# Altium PCB 2401透传3.PcbDoc
Units mm, origin at the board's own origin, x right, y up, seen from the top; angles counter-clockwise.
Board outline 152.4 x 101.6 mm, 2 copper layers (Top Layer, Bottom Layer); 27 components, 59 nets, 148 pads, 30 vias.
Unrouted connection lines stored in the file: 3.
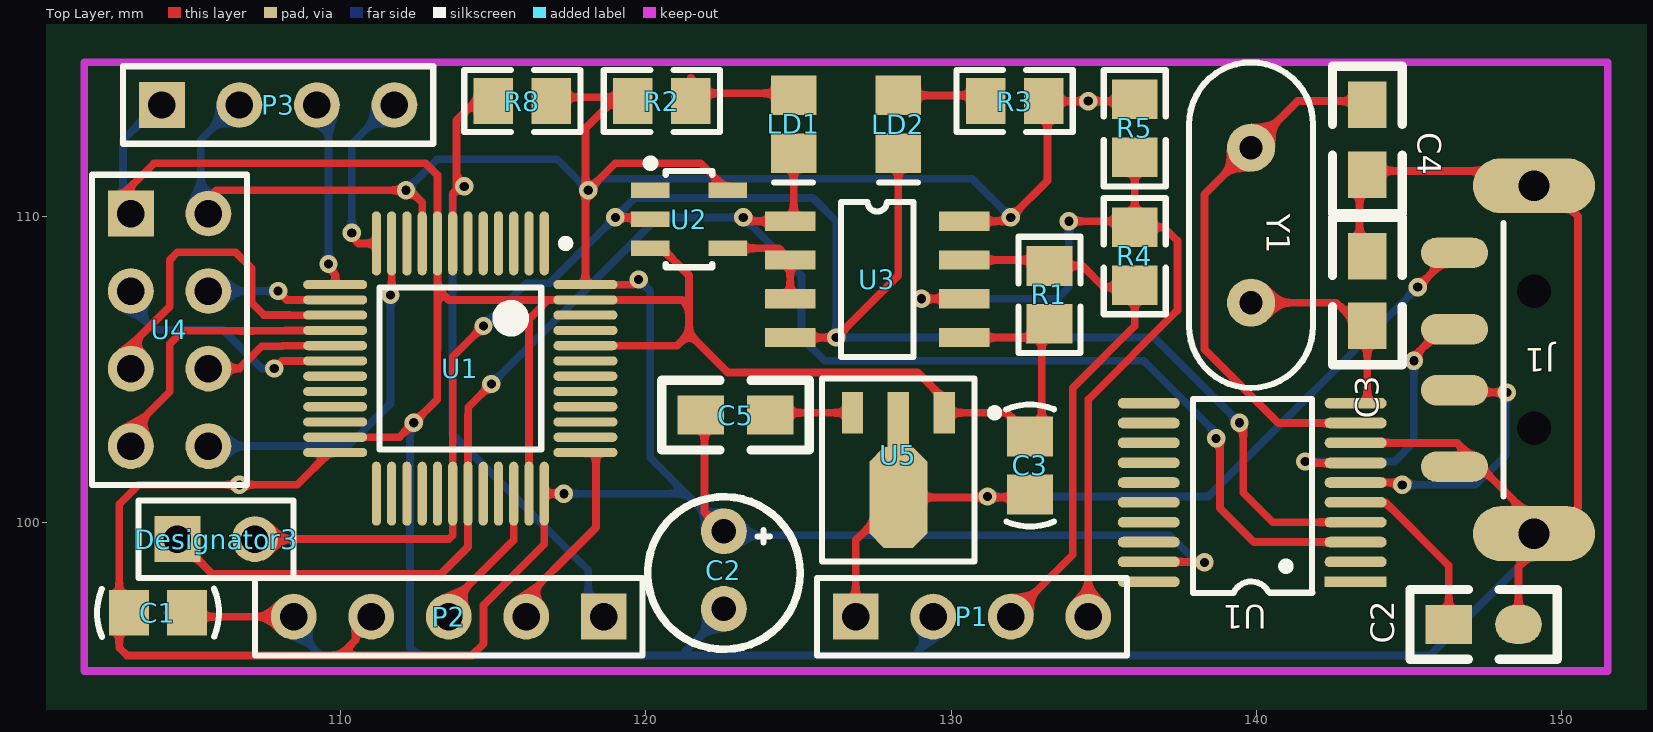
[diagram p0: Top Layer view]
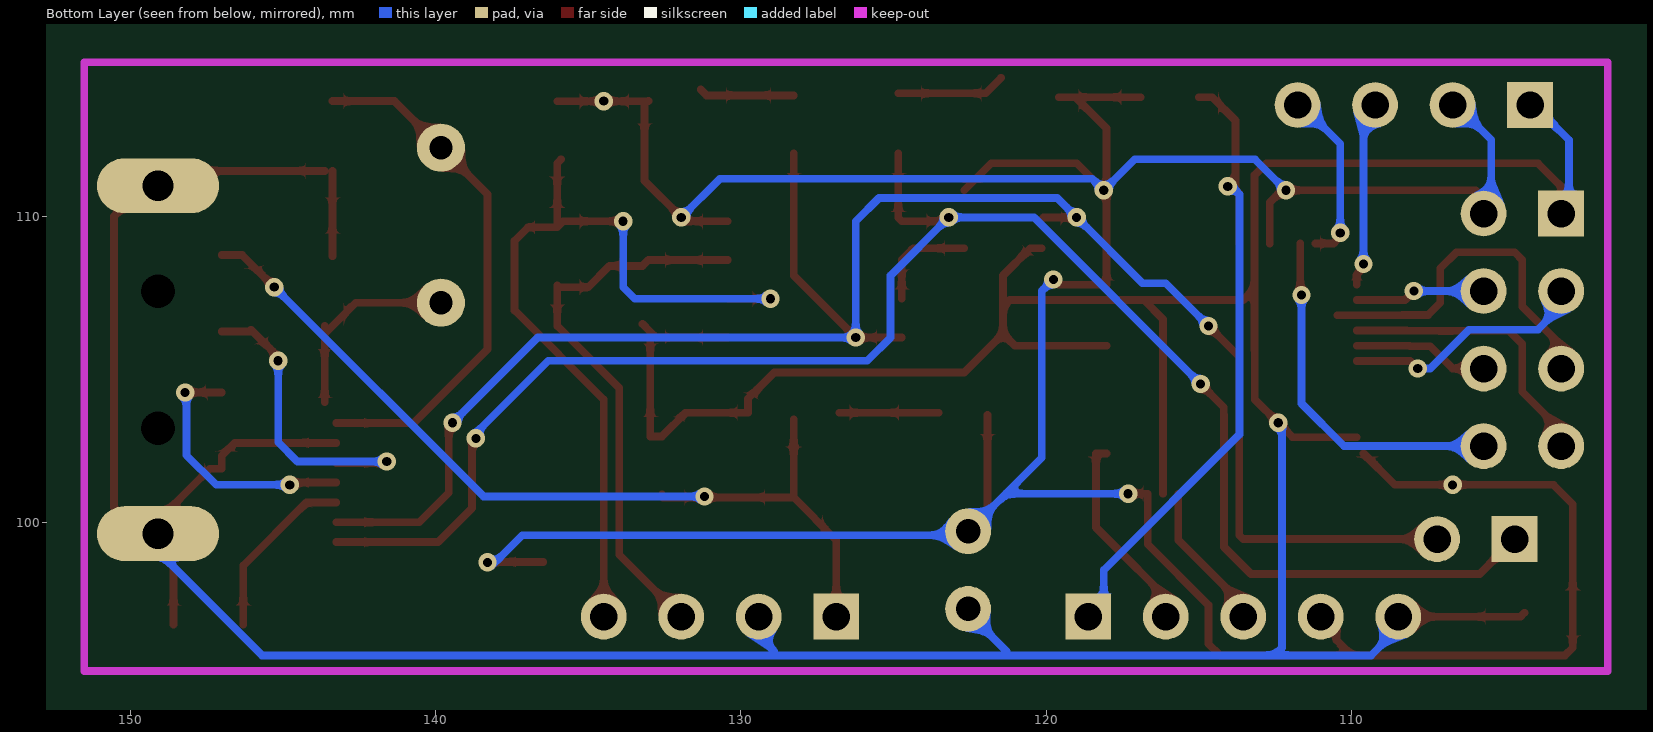
[diagram p1: Bottom Layer view, seen from below]

## Layer stack, top to bottom
Top Solder: solder mask 0.0102, Solder Resist, Dk 3.5
Top Layer: signal copper 0.0356
Dielectric 1: dielectric 0.32, FR-4, Dk 4.8
Bottom Layer: signal copper 0.0356
Bottom Solder: solder mask 0.0102, Solder Resist, Dk 3.5

## Board outline
25.4,25.4 177.8,25.4 177.8,127 25.4,127

## Design rules (kind name [scope] priority, off if disabled: settings)
Clearance [All] p1: gap=0.254 ignorepadtopadclearanceinfootprint=FALSE except(0: Arc-Hole Track-Hole SMDPad-Hole THPad-Hole Via-Hole Fill-Hole Poly-Hole Region-Hole Text-Hole)
PolygonConnect [All] p1: connectstyle=Relief reliefconductorwidth=0.254 reliefentries=4 polygonreliefangle="90 Angle" airgapwidth=0.254
RoutingVias [All] p1: holewidth=0.711 width=1.27 viastyle="Through Hole" minholewidth=0.711 minwidth=1.27 maxholewidth=0.711 maxwidth=1.27
SolderMaskExpansion [All] p1: expansion=0.102
Width [All] p1: maxlimit=0.254 minlimit=0.254 preferedwidth=0.254
30 further rules are at their usual default settings.

## Classes and differential pairs
component class 2401透传: C1 C2 LD1 LD2 P1 P2 R1 R2 R3 R4 R5 U2 U3 U4 U5

## Components (designator, comment, footprint, x,y, rotation, side; value= is the part's Value field where it differs from the comment)
C1 "Cap" C-RAD-0805 104.013,97.028 r180 top value=104
C2 "16V/220UF" C_Φ5 122.555,100.33 r270 top
C2 "Cap" 0805#1 148.59,96.647 r180 top
C3 "Cap" C-RAD-0805 132.588,101.854 r270 top value=104 (schematic designator C1)
C3 "Cap" 0805#2 143.637,106.426 r90 top
C4 "Cap" 0805#2 143.637,113.665 r270 top
C5 "Cap" 0805#2 121.793,103.505 r0 top (schematic designator C4)
Designator3 "Comment" HDR1X2 104.648,99.441 r0 top
J1 "USB-2" USB-SM-A 151.807,105.319 r0 top
LD1 "red" LED_0805 124.841,113.03 r270 top
LD2 "red" LED_0805 128.27,113.03 r270 top
P1 "Header 4" HDR1X4 126.873,96.901 r0 top
P2 "5pin" HDR1X5 118.618,96.901 r180 top
P3 "Header 4" HDR1X4 104.14,113.665 r0 top (schematic designator P1)
R1 "电阻" 0805-1 133.223,107.442 r270 top value=10k
R2 "电阻" 0805-1 120.523,113.792 r180 top value=1k
R3 "电阻" 0805-1 132.08,113.792 r0 top value=1k
R4 "电阻" 0805-1 136.017,108.712 r270 top value=100
R5 "电阻" 0805-1 136.017,112.903 r270 top value=10k
R8 "Res1" 0805-1 115.951,113.792 r180 top value=10K (schematic designator R6)
U1 "CH340T" SSOP20 140.081,100.584 r90 top
U1 "STM32F103C" LQFP-48_M 113.919,105.029 r270 top
U2 "74AHC1G14DBVR" SOT-23-5 120.142,110.871 r0 top
U3 "MAX485" SOP-8 124.729,109.855 r0 top
U4 "WIRELESS" HDR2X4 103.124,110.109 r270 top
U5 "1117-3.3" SOT-89 128.27,103.357 r180 top
Y1 "XTAL" XTAL2 139.827,112.268 r270 top

## Footprints (in the part's own frame and the unit in brackets; to place one, negate y for a bottom-side part, rotate by r counter-clockwise, add the part's x,y. Pads: shape width x height; smd on the part's side, far side on the other; paste and mask are expansions set on the pad)
0805#1 [mil]
  oval 60x50 smd: 1(0,0)
  rect 60x50 smd: 2(90,0)
  silkscreen extent -50,-45 140,45
0805#2 [mil]
  rect 60x50 smd: 1(0,0) 2(90,0)
  silkscreen extent -50,-45 140,45
0805-1 [mm]
  rect 1.3x1.5 smd: 1(-0.95,0) 2(0.95,0)
  silkscreen extent -1.91,-1.02 1.91,1.02, body extent -1,-0.62 1,0.63, height 0.5
C-RAD-0805 [mm]
  rect 1.3x1.5 smd: 1(-0.95,0) 2(0.95,0)
  silkscreen extent -2,-0.79 2,0.79, body extent -1.27,-0.64 1.27,0.64, height 0.9
C_Φ5 [mm]
  round 1.5 hole 0.8: 1(0.635,0) 2(3.175,0)
  silkscreen extent -0.5,-2.5 4.5,2.5
HDR1X2 [mm] "Connector; Header; 2 Position"
  rect 1.5x1.5 hole 0.9: 1(0,0)
  round 1.5 hole 0.9: 2(2.54,0)
  silkscreen extent -1.27,-1.27 3.81,1.27
HDR1X4 [mm] "Connector; Header; 4 Position"
  rect 1.5x1.5 hole 0.9: 1(0,0)
  round 1.5 hole 0.9: 2(2.54,0) 3(5.08,0) 4(7.62,0)
  silkscreen extent -1.27,-1.27 8.89,1.27
HDR1X5 [mm] "Connector; Header; 5 Position"
  rect 1.5x1.5 hole 0.9: 1(0,0)
  round 1.5 hole 0.9: 2(2.54,0) 3(5.08,0) 4(7.62,0) 5(10.16,0)
  silkscreen extent -1.27,-1.27 11.43,1.27
HDR2X4 [mm] "Connector; Header; 4x2 Position"
  rect 1.5x1.5 hole 0.9: 1(0,0)
  round 1.5 hole 0.9: 2(0,2.54) 3(2.54,0) 4(2.54,2.54) 5(5.08,0) 6(5.08,2.54) 7(7.62,0) 8(7.62,2.54)
  silkscreen extent -1.27,-1.27 8.89,3.81
LED_0805 [mm]
  rect 1.3x1.5 smd: 1(-0.95,0) 2(0.95,0)
  silkscreen extent 1.91,-0.63 1.91,0.64
LQFP-48_M [mm] "Thin QFP, 48-Leads, Body 7x7mm, Pitc"
  oval 2.1x0.3 smd: 1(-4.1,2.75) 2(-4.1,2.25) 3(-4.1,1.75) 4(-4.1,1.25) 5(-4.1,0.75) 6(-4.1,0.25) 7(-4.1,-0.25) 8(-4.1,-0.75) 9(-4.1,-1.25) 10(-4.1,-1.75) 11(-4.1,-2.25) 12(-4.1,-2.75) 25(4.1,-2.75) 26(4.1,-2.25) 27(4.1,-1.75) 28(4.1,-1.25) 29(4.1,-0.75) 30(4.1,-0.25) 31(4.1,0.25) 32(4.1,0.75) 33(4.1,1.25) 34(4.1,1.75) 35(4.1,2.25) 36(4.1,2.75)
  oval 0.3x2.1 smd: 13(-2.75,-4.1) 14(-2.25,-4.1) 15(-1.75,-4.1) 16(-1.25,-4.1) 17(-0.75,-4.1) 18(-0.25,-4.1) 19(0.25,-4.1) 20(0.75,-4.1) 21(1.25,-4.1) 22(1.75,-4.1) 23(2.25,-4.1) 24(2.75,-4.1) 37(2.75,4.1) 38(2.25,4.1) 39(1.75,4.1) 40(1.25,4.1) 41(0.75,4.1) 42(0.25,4.1) 43(-0.25,4.1) 44(-0.75,4.1) 45(-1.25,4.1) 46(-1.75,4.1) 47(-2.25,4.1) 48(-2.75,4.1)
  silkscreen extent -4.22,-2.65 2.65,3.57, body extent -3.5,-3.5 3.5,3.5, height 1.6
SOP-8 [mil]
  rect 65x25 smd: 1(0,0) 2(0,-50) 3(0,-100) 4(0,-150) 5(224.41,-150) 6(224.41,-100) 7(224.41,-50) 8(224.41,0)
  silkscreen extent 65,-175 159,25
SOT-23-5 [mil]
  rect 50x20 smd: 1(0,0) 2(0,-37.4) 3(0,-74.8) 4(100,-74.8) 5(100,0)
  silkscreen extent 0,-99 80,35
SOT-89 [mm]
  rect 0.7x1.8 smd: 1(0,0)
  oct 1.9x3.3 smd: 1(0,2.55)
  rect 0.7x1.35 smd: 2(-1.5,-0.225) 3(1.5,-0.225)
  silkscreen extent -3.28,-1.35 2.5,4.65
SSOP20 [mm]
  rect 0.35x2.032 smd: 1(-2.54,-3.175)
  oval 0.35x2.032 smd: 2(-1.89,-3.175) 3(-1.24,-3.175) 4(-0.59,-3.175) 5(0.06,-3.175) 6(0.71,-3.175) 7(1.35,-3.175) 8(2.01,-3.175) 9(2.66,-3.175) 10(3.31,-3.175) 11(3.31,3.606) 12(2.66,3.606) 13(2.01,3.606) 14(1.36,3.606) 15(0.71,3.606) 16(0.06,3.606) 17(-0.59,3.606) 18(-1.24,3.606) 19(-1.89,3.606) 20(-2.54,3.606)
  silkscreen extent -2.91,-1.75 3.45,2.15
USB-SM-A [mm]
  oval 2.2x1 smd: 1(-5.309,3.5) 2(-5.309,1) 3(-5.309,-1) 4(-5.309,-3.5)
  oval 4x1.8 hole 1: 5(-2.709,-5.7) 6(-2.709,5.7)
  round 0.8 hole 1.1 unplated: MH1(-2.709,-2.25) MH2(-2.709,2.25)
  silkscreen extent -3.71,-4.47 -3.71,4.48
XTAL2 [mil]
  round 62 hole 30: 1(0,0) 2(200,0)
  silkscreen extent -110,-80 310,80

## Part data
C1 C3: "无极性电容", LatestRevisionDate=17-Jul-2002, LatestRevisionNote="Re-released for DXP Platform.", PackageReference=RAD-0.3, Published=8-Jun-2000, Publisher="Altium Limited"
C2: library part Ca, "电解电容", LatestRevisionDate=17-Jul-2002, LatestRevisionNote="Re-released for DXP Platform.", PackageReference=POLAR0.8, Published=8-Jun-2000, Publisher="Altium Limited"
C2 C3 C4 C5: "Capacitor"
LD1 LD2: library part LED2, "Typical RED, GREEN, YELLOW, AMBER GaAs LED", Published=8-Jun-2000, Publisher="Altium Limited", Revision="July-2002: Re-released for DXP Platform."
P1 P3: "Header, 4-Pin", LatestRevisionDate=17-Jul-2002, LatestRevisionNote="Re-released for DXP Platform.", Publisher="Altium Limited"
P2: library part "Header 5", "程序下载接口", LatestRevisionDate=17-Jul-2002, LatestRevisionNote="Re-released for DXP Platform.", Publisher="Altium Limited"
R1 R2 R3 R4 R5: library part Res1, "贴片电阻", LatestRevisionDate=17-Jul-2002, LatestRevisionNote="Re-released for DXP Platform.", PackageReference=AXIAL-0.4, Published=8-Jun-2000, Publisher="Altium Limited"
R8: "贴片电阻", LatestRevisionDate=17-Jul-2002, LatestRevisionNote="Re-released for DXP Platform.", PackageReference=AXIAL-0.4, Published=8-Jun-2000, Publisher="Altium Limited"
U1: "STM32单片机48引脚"
U4: library part NRF24L01
U5: library part 71, "LDO", ComponentAvailability=Obsolete, ComponentLink1Description="Manufacturer Link", ComponentLink1URL=http://www.national.com/, ComponentLink2Description="Discontinuation Notice", ComponentLink2URL=http://www.national.com/obs/obsolescence.txt, DatasheetVersion=May-1999, Note="Tab is connected to GND", PackageDescription="TO, Thru-Hole, Vertical, Heatsink Mounted; 3 In-Line Leads; Pitch 2.54 mm", PackageReference=T03B, PackageVersion=1995, Published=15-Apr-2002, Publisher="Altium Limited"
Y1: "Crystal Oscillator"

## Via types
v1: diameter 0.6, hole 0.3, Top Layer to Bottom Layer, 30 vias

## Nets (pads, with @x,y where several pads share a name; then routed paths per layer and width w, separated by ;. In a path a pad name is that pad's centre, name@x,y a point inside that pad or via, vN(x,y) a via of type N, cw(c..) or ccw(c..) an arc to the next point about the centre after c; other vN are vias at no path point)
5VCC: C3.2@132.588,100.904 J1.1 P1.1 U5.1 | length 30.5
  Top Layer w0.254: P1.1 126.873,99.41 U5.1@128.27,100.807 ; U5.1@128.27,103.357 U5.1@128.27,100.807 ; C3.2@132.588,100.904 132.588,100.838 132.557,100.807 U5.1@128.27,100.807 ; v1(145.288,107.696) 146.339,108.747 J1.1@147.006,108.747
  Bottom Layer w0.254: v1(131.191,100.838) 138.43,100.838 v1(145.288,107.696)
485_A: P1.4 R4.1 R5.2 U3.6 | length 28.2
  Top Layer w0.254: v1(129.032,107.315) U3.6 ; v1(133.858,109.855) 135.824,109.855 R4.1 ; P1.4 134.493,104.013 137.414,106.934 137.414,109.22 136.972,109.662 R4.1 ; R5.2@135.89,111.887 136.017,111.76 R4.1
  Bottom Layer w0.254: v1(129.032,107.315) 133.477,107.315 133.858,107.696 v1(133.858,109.855)
485_B: P1.3 R1.1 R4.2 U3.7 | length 18.5
  Top Layer w0.254: U3.7 133.03,108.585 R1.1 134.305,108.392 135.001,107.696 R4.2@136.017,107.696 ; P1.3 133.985,98.933 133.985,104.394 136.017,106.426 R4.2@136.017,107.696 ; R4.2 R4.2@136.017,107.696
A_rising_edge: U1.10@112.169,109.129
ANassistrelay: U1.39
ANmrelayCLOSE: U1.41
ANmrelayOPEN: U1.40
AVCC: 
BNassistrelay: U1.33
BNmrelayCLOSE: U1.43
BNmrelayOPEN: U1.42
BOOT0: 
BOOT1: U1.20@109.819,104.279
CNassistrelay: U1.29
CNmrelayCLOSE: U1.46
CNmrelayOPEN: U1.45
CNopen_signal: U1.19@109.819,104.779
D+: J1.3 U1.6@143.256,101.294 | length 8.8
  Top Layer w0.254: U1.6@143.256,101.294 v1@144.982,101.294 ; J1.3@147.006,104.247 v1(148.209,104.247)
  Bottom Layer w0.254: v1(144.78,101.219) 147.193,101.219 148.167,102.193 148.167,104.205 v1(148.209,104.247)
D-: J1.2 U1.7@143.256,101.934 | length 10.5
  Top Layer w0.254: v1@141.652,101.934 U1.7@143.256,101.934 ; v1(145.161,105.283) 145.161,105.41 146.05,106.299 146.102,106.247 J1.2@147.006,106.247
  Bottom Layer w0.254: v1(141.605,101.981) 144.526,101.981 145.161,102.616 v1(145.161,105.283)
GND: C1.1 C2.1@148.59,96.647 C2.2@122.555,97.155 C3.1@132.588,102.804 C3.2@143.637,108.712 C4.2 J1.4 J1.5 J1.6 P1.2 P2.5 P3.1 R1.2 U1.8 U1.23 U1.35 U1.44 U1.47 U2.3 U3.5 U4.1 U5.2 | length 159.9
  Top Layer w0.254: U4.1@102.616,110.109 102.616,110.49 103.886,111.76 112.776,111.76 113.169,111.367 113.169,109.129 113.169,107.978 113.169,107.648 ; C1.1@104.328,97.028 104.455,96.901 107.823,96.901 P2.5@107.95,97.028 ; U1.23 111.923,102.779 v1(112.395,103.251) 113.161,104.017 113.161,105.624 113.169,105.632 113.169,107.648 ; U1.35 116.169,102.489 116.169,106.644 116.804,107.279 ; U1.44 121.019,105.779 121.412,106.172 ; U2.3 120.518,108.971 121.412,108.077 121.412,107.061 ; U3.5 132.776,106.045 R1.2@132.969,106.238 ; R1.2 R1.2@132.969,106.238 ; U1.8@143.256,102.594 146.58,102.594 147.006,102.168 147.006,101.747 147.406,101.747 J1.5@149.606,99.547 ; C3.2@143.383,108.712 C4.2@143.383,111.506 ; C4.2@143.637,111.506 149.047,111.506 150.537,110.016 150.537,100.478 J1.5@149.606,99.547 ; C2.1@148.59,96.647 148.59,98.531 J1.5@149.606,99.547 ; 113.169,107.648 113.538,107.279 116.804,107.279 ; 116.804,107.279 U1.47 121.194,107.279 121.412,107.061 ; 121.412,106.172 121.412,107.061 ; 121.412,106.172 122.682,104.902 128.905,104.902 129.77,104.037 U5.2 131.81,103.582 132.588,102.804 132.969,102.804 R1.2@132.969,106.238
  Bottom Layer w0.254: U4.1@102.87,110.109 102.87,112.522 P3.1@104.14,113.792 ; P2.5@107.95,97.028 109.347,95.631 112.522,95.631 ; v1@112.268,103.251 112.268,95.885 112.522,95.631 ; 121.285,95.758 C2.2@122.745,97.218 ; 128.905,95.758 129.413,96.266 P1.2 ; J1.5@149.606,99.547 145.69,95.631 112.522,95.631
I2C_SCL: U1.21
I2C_SDA: U1.22
KEY_TOX: U1.32
LEDA: U1.26
LEDB: U1.27
LEDC: U1.28
LEDERR: U1.25
NetC2_2: C2.2@146.304,96.647 U1.5@143.256,100.644 | length 5.8
  Top Layer w0.254: U1.5@143.256,100.644 144.233,100.644 146.304,98.573 C2.2@146.304,96.647
NetD1_1: 
NetD2_1: 
NetD3_1: 
NetJ1_1: 
NetLD1_1: LD1.1 R2.1 | length 3.6
  Top Layer w0.254: 121.473,114.554 121.981,114.046 LD1.1@124.841,114.046
NetLD2_1: LD2.1 R3.1 | length 3.1
  Top Layer w0.254: LD2.1 131.125,113.98 R3.1@131.318,114.173
NetU2_4: U2.4 U3.2 U3.3 | length 3.5
  Top Layer w0.254: U2.4 124.343,108.971 U3.2 U3.3
OSC1: C4.1 U1.9@143.256,103.244 Y1.1 | length 17.4
  Top Layer w0.254: U1.9@143.256,103.244 140.723,103.244 138.303,105.664 138.303,110.744 Y1.1 141.351,113.792 C4.1@143.383,113.792
OSC2: C3.1@143.637,106.426 U1.10@143.256,103.894 Y1.2 | length 6.7
  Top Layer w0.254: Y1.2 142.621,107.188 C3.1@143.637,106.172 ; U1.10@143.637,103.927 C3.1@143.637,106.172 ; C3.1@143.637,106.426 C3.1@143.637,106.172
OSC_IN: U1.5@114.669,109.129
OSC_OUT: U1.6@114.169,109.129
PA1: U1.11@111.669,109.129 U4.8 | length 12.2
  Top Layer w0.254: v1(111.633,107.442) 111.669,107.478 U1.11@111.669,109.129
  Bottom Layer w0.254: U4.8@105.156,102.489 U4.8@105.283,102.616 ; U4.8@105.41,102.489 U4.8 110.236,102.489 111.633,103.886 v1(111.633,107.442)
PA4: U1.14@109.819,107.279 U4.4 | length 4.9
  Top Layer w0.254: U4.4@105.156,107.569 U4.4@105.446,107.279 ; v1(107.95,107.569) 108.24,107.279 U1.14@109.819,107.279
  Bottom Layer w0.254: U4.4@105.41,107.569 U4.4 v1(107.95,107.569)
PA5: U1.15@109.819,106.779 U4.5 | length 12.1
  Top Layer w0.254: U4.5@102.616,105.029 102.87,105.029 102.87,105.537 104.394,107.061 104.394,108.585 104.648,108.839 106.553,108.839 107.081,108.311 107.081,107.188 107.482,106.787 108.331,106.787 ; 108.331,106.779 109.819,106.779 U1.15@110.454,106.779
PA6: U1.16@109.819,106.279 U4.7 | length 10.1
  Top Layer w0.254: U4.7@102.616,102.489 104.394,104.267 104.394,105.835 104.83,106.271 106.68,106.271 106.688,106.263 107.116,106.263 107.124,106.271 108.585,106.271 ; 108.184,106.279 U1.16@109.819,106.279
PA7: U1.17@109.819,105.779 U4.6 | length 5
  Top Layer w0.254: U4.6@105.156,105.029 U4.6 106.68,105.029 107.414,105.763 108.077,105.763 108.093,105.779 U1.17@109.819,105.779
PB0: U1.18@109.819,105.279 U4.3 | length 8.4
  Top Layer w0.254: v1(107.823,105.029) 108.073,105.279 U1.18@109.819,105.279
  Bottom Layer w0.254: U4.3@102.616,107.569 103.886,106.299 106.144,106.299 107.414,105.029 v1(107.823,105.029)
PC13: U1.2@116.169,109.129
PC14: U1.3@115.669,109.129
PC15: U1.4@115.169,109.129
RESET: P2.1 R8.2 U1.7@113.669,109.129 | length 21.6
  Top Layer w0.254: U1.7@113.669,109.129 113.669,110.748 113.792,110.871 113.792,113.157 114.554,113.919 R8.2@115.001,113.919
  Bottom Layer w0.254: v1(114.046,110.998) 113.919,110.998 113.665,110.744 113.665,102.87 118.11,98.425 P2.1@118.11,97.028
RXD: 
SWCLK: P2.2 U1.37 | length 6.7
  Top Layer w0.254: P2.2@115.57,97.028 118.364,99.822 118.364,102.248 U1.37@118.019,102.248
SWDIO: P2.3 U1.34 | length 5.1
  Top Layer w0.254: P2.3@113.03,97.028 113.284,97.028 115.669,99.413 U1.34
TXD: 
USART1_RX: Designator3.1 LD1.2 P3.4 U1.3@143.256,99.344 U1.12@111.169,109.129 U1.31 U3.1 | length 63
  Top Layer w0.254: Designator3.1 105.791,98.298 113.284,98.298 114.169,99.183 U1.31 114.169,103.505 ; v1@110.49,109.22 110.581,109.129 U1.12@111.169,109.129 ; 114.177,103.505 114.177,103.763 v1(114.935,104.521) ; v1(123.19,109.982) 123.317,109.855 U3.1 124.841,109.967 LD1.2 ; v1@138.811,102.743 138.811,100.457 139.924,99.344 U1.3@143.256,99.344
  Bottom Layer w0.254: v1(110.363,109.474) 110.363,112.395 P3.4@111.76,113.792 ; v1(114.935,104.521) 120.396,109.982 v1(123.19,109.982) 125.095,108.077 125.095,106.045 125.857,105.283 136.315,105.283 v1@138.833,102.765
  other v1: 138.684,102.743
USART1_TX: Designator3.2 LD2.2 P3.3 U1.4@143.256,99.994 U1.13@109.819,107.779 U1.30 U2.2 U3.4 | length 67.4
  Top Layer w0.254: Designator3.2 113.538,99.441 113.669,99.572 U1.30 113.669,105.414 v1(114.681,106.426) ; v1@109.601,108.331 109.819,108.113 U1.13@109.819,107.779 ; v1(118.999,109.982) 120.081,109.982 U2.2 ; U3.4 v1(126.238,106.045) 128.27,108.077 LD2.2 ; v1@139.573,102.997 139.573,100.965 140.544,99.994 U1.4@143.256,99.994
  Bottom Layer w0.254: P3.3@109.22,113.792 109.601,113.411 v1(109.601,108.458) v1@109.601,108.331 ; v1(114.681,106.426) 116.078,107.823 116.84,107.823 v1(118.999,109.982) 119.634,110.617 125.476,110.617 126.238,109.855 v1(126.238,106.045) 136.652,106.045 v1@139.382,103.314
  other v1: 139.446,103.251
V3.3: C1.2 C2.1@122.555,99.695 C5.1 C5.2 P2.4 P3.2 R2.2 R3.2 R5.1 R8.1 U1.9@112.669,109.129 U1.19@136.475,98.694 U1.24 U1.36 U1.48 U2.5 U3.8 U4.2 U5.3 | length 131.1
  Top Layer w0.254: U4.2@105.156,110.109 105.918,110.871 v1(112.141,110.871) 112.268,110.871 112.669,110.47 U1.9@112.669,109.129 ; U1.24@109.601,102.248 108.572,101.219 v1(106.68,101.219) 103.378,101.219 102.743,100.584 102.743,95.885 102.997,95.631 109.982,95.631 ; P2.4@110.49,97.028 110.49,96.139 109.982,95.631 ; R8.1@116.901,113.919 R2.2@119.035,113.919 ; v1(117.312,100.929) U1.36 116.669,99.27 114.681,97.282 114.681,96.012 114.3,95.631 109.982,95.631 ; R2.2@119.573,113.919 R2.2@119.035,113.919 ; v1@119.59,107.779 U1.48 v1@118.019,110.78 ; C5.1@121.92,103.505 121.92,100.33 C2.1@122.555,99.695 ; U2.5 121.793,111.76 118.999,111.76 v1(118.11,110.871) v1@118.019,110.78 ; C5.2@123.521,103.582 U5.3 ; U3.8 131.826,109.855 v1(131.953,109.982) 133.157,111.186 R3.2@133.157,113.787 ; R3.2 133.035,113.787 R3.2@133.157,113.787 ; R5.1@136.017,113.787 R3.2@133.157,113.787 ; U1.19@136.475,98.694 138.288,98.694 v1(138.303,98.679) ; v1@118.019,110.78 118.019,112.903 R2.2@119.035,113.919
  Bottom Layer w0.254: U4.2@105.41,110.109 105.41,112.522 P3.2@106.68,113.792 ; v1(112.141,110.871) 113.157,111.887 117.094,111.887 v1(118.11,110.871) 118.491,111.252 130.683,111.252 v1(131.953,109.982) ; v1(117.312,100.929) 121.321,100.929 ; v1(119.761,107.95) 120.142,107.569 120.142,102.108 121.321,100.929 ; v1@138.176,98.552 137.16,99.568 122.682,99.568 122.555,99.695 121.321,100.929
  other v1: 134.493,113.792
VBAT: U1.1@116.669,109.129
VCC: 
WDI: U1.38
pads on no net: J1.MH1 J1.MH2 U1.1@143.256,98.044 U1.2@143.256,98.694 U1.11@136.475,103.894 U1.12@136.475,103.244 U1.13@136.475,102.594 U1.14@136.475,101.944 U1.15@136.475,101.294 U1.16@136.475,100.644 U1.17@136.475,99.994 U1.18@136.475,99.344 U1.20@136.475,98.044 U2.1

## Keep-outs
Keep-Out Layer:
  lines w0.254: 101.6,95.123 101.6,115.062 151.511,115.062 151.511,95.123 101.6,95.123